# Altium PCB Hex_Link_Rec.PcbDoc
Units mm, origin at the board's own origin, x right, y up, seen from the top; angles counter-clockwise.
Board outline 19.23 x 56.77 mm, 2 copper layers (Top1, Bottom4), stack 1.071 mm thick; 38 components, 50 nets, 149 pads, 70 vias.
Unrouted connection lines stored in the file: 56.
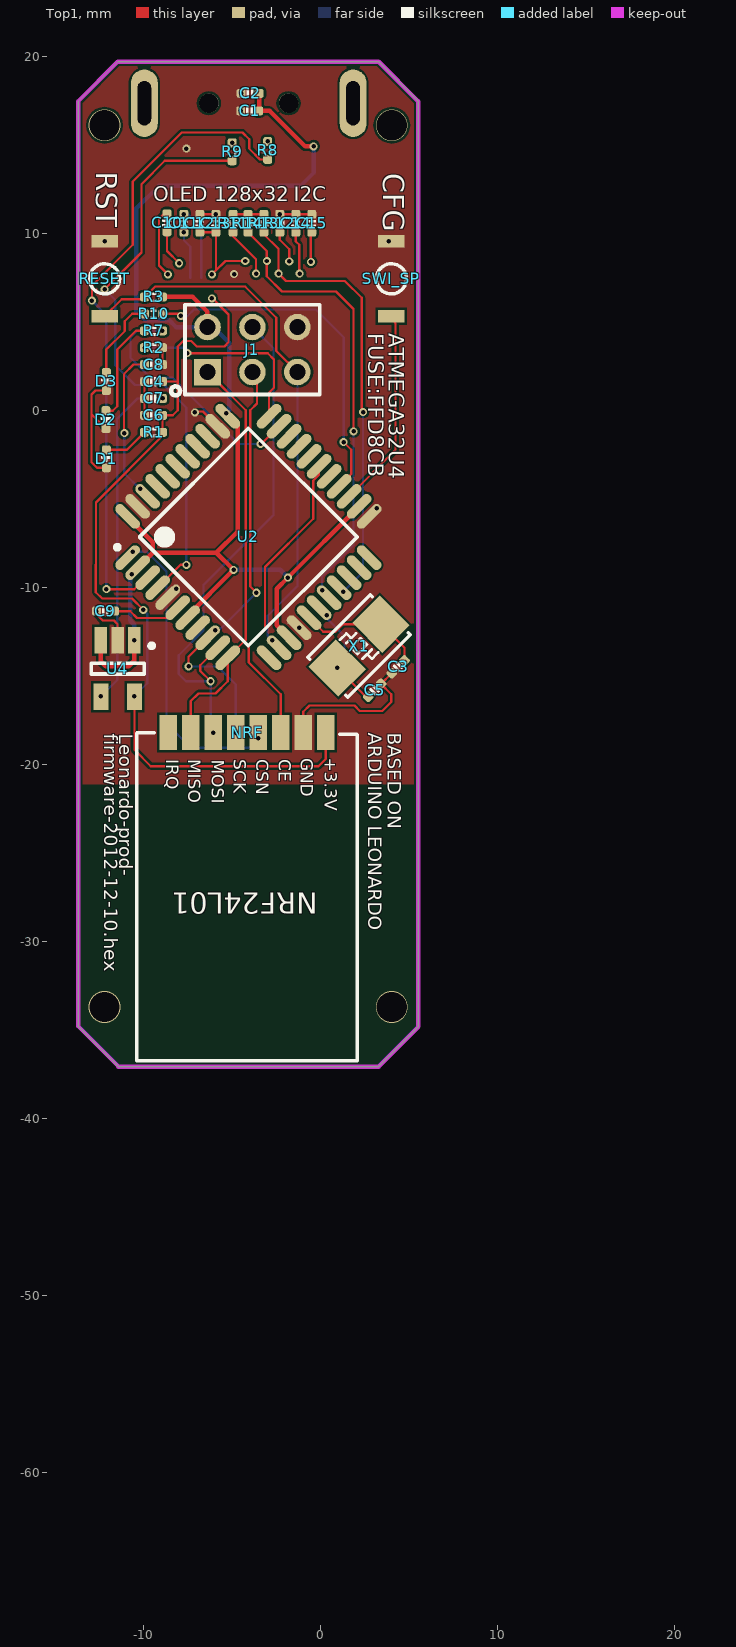
[diagram p0: Top1 view]
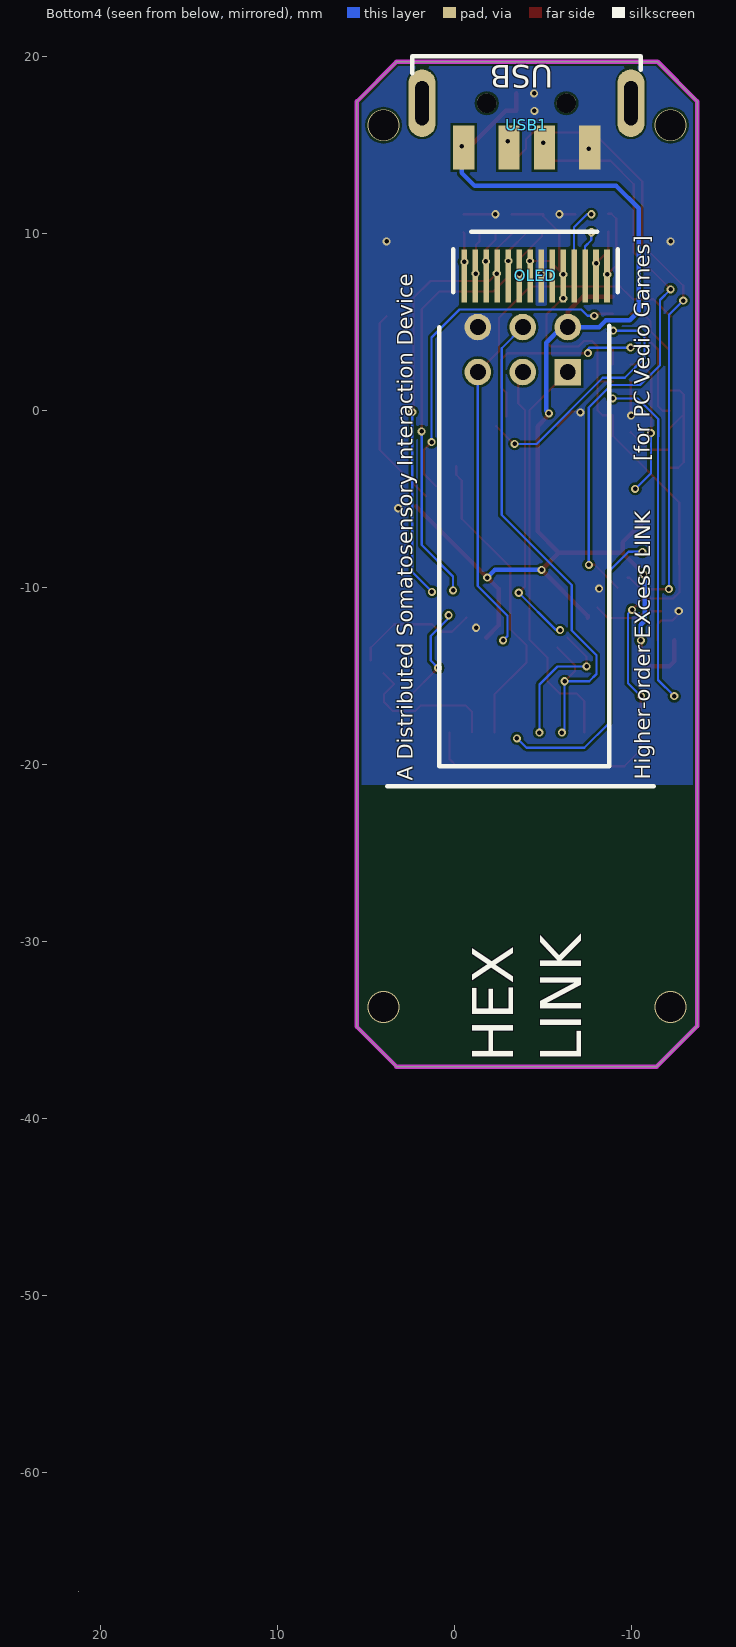
[diagram p1: Bottom4 view, seen from below]
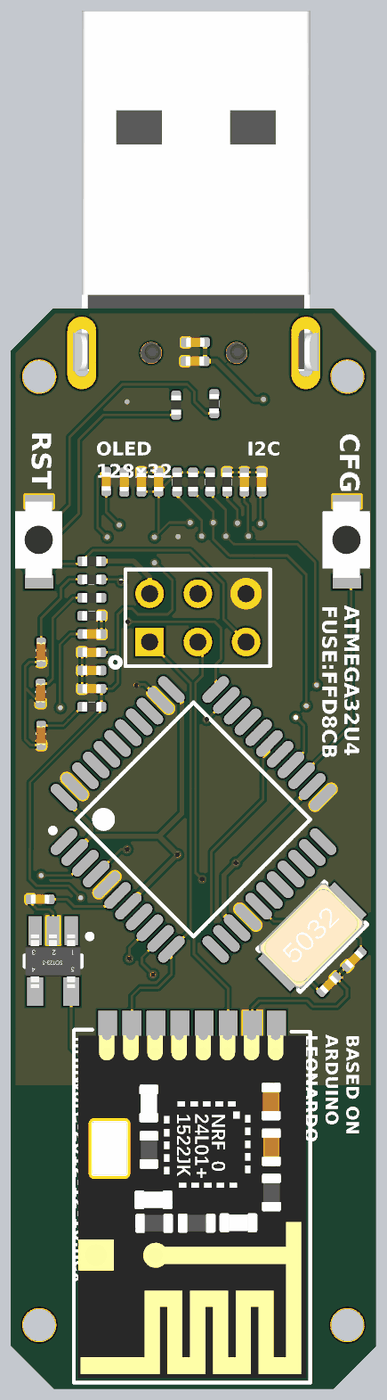
[diagram p2: 3D render of the assembled board from above, using the file's embedded part models]

## Layer stack, top to bottom
Top Solder: solder mask 0.0102, Solder Resist, Dk 3.5
Top1: signal copper 0.0356
Dielectric 2: core 1, PP-006, Dk 4.2
Bottom4: signal copper 0.0356
Bottom Solder: solder mask 0.0102, Solder Resist, Dk 3.5

## Board outline
-13.691,-34.773 -13.691,17.475 -11.456,19.71 3.303,19.71 5.537,17.475 5.537,-34.823 3.303,-37.058 3.302,-37.059 -11.405,-37.059

## Design rules (kind name [scope] priority, off if disabled: settings)
Clearance [All] p1: gap=0.127 ignorepadtopadclearanceinfootprint=FALSE
ComponentClearance [All] p1: gap=0 collisioncheckmode=3 verticalgap=0 showdistances=FALSE
DiffPairsRouting [All] p1: maxlimit=0.229 minlimit=0.229 mostfreqgap=0.229 toplayer_minwidth=0.102 toplayer_maxwidth=0.102 toplayer_prefwidth=0.102 bottomlayer_minwidth=0.102 bottomlayer_maxwidth=0.102 bottomlayer_prefwidth=0.102 maxuncoupledlength=12.7
FanoutControl Fanout_BGA [All] p1: bgadir=Out bgaviamode=Centered fanoutstyle=Auto fanoutdirection=Alternating viagrid=0.025 // Fanout_BGA (Default Rule)
HoleSize [All] p1: absolutevalues=TRUE maxlimit=254 minlimit=0.203 maxpercent=80.000 minpercent=20.000
MinimumSolderMaskSliver [All] p1 off: minsoldermaskwidth=0.051
PlaneClearance [All] p1: clearance=0.203
PlaneConnect [All] p1: planeconnectstyle=Direct reliefexpansion=0.508 reliefentries=4 reliefconductorwidth=0.254 reliefairgap=0.254
PolygonConnect [All] p1: connectstyle=Direct reliefconductorwidth=0.254 reliefentries=4 polygonreliefangle="90 Angle" airgapwidth=0.254
RoomDefinition Arduino_Mouse_Keyboard [InComponentClass('Arduino_Mouse_Keyboard')] p1: confinementstyle=ConfineIn formatcopy=TRUE lockcomponents=FALSE outline -30.023,-51.156 21.615,-51.156 21.615,47.168 -30.023,47.168
RoutingVias [All] p1: holewidth=0.203 width=0.406 viastyle="Through Hole" minholewidth=0.152 minwidth=0.305 maxholewidth=0.711 maxwidth=1.27
SilkToBoardRegionClearance [All] p1 off:
SilkToSilkClearance [All] p1: silktosilkclearance=0
SilkToSolderMaskClearance [IsPad] p1: minsilkscreentomaskgap=0 clearancetoexposedcopper=TRUE
SolderMaskExpansion [All] p1: expansion=0.076
Width 3V3 [InNet('3V3')] p1: maxlimit=0.254 minlimit=0.254 preferedwidth=0.254
Width VDD_5V [InNet('VDD_5V')] p2: maxlimit=0.254 minlimit=0.254 preferedwidth=0.254
Width [All] p3: maxlimit=254 minlimit=0.127 preferedwidth=0.127
20 further rules are at their usual default settings.

## Components (designator, comment, footprint, x,y, rotation, side; value= is the part's Value field where it differs from the comment)
C1 "0.1uF" CAP_0402 -3.988,16.942 r180 top value=0.1u
C2 "10uF" CAP_0402 -3.962,17.932 r180 top
C3 "20pF" CAP_0402 4.394,-14.478 r225 top
C4 "0.1uF" CAP_0402 -9.423,1.648 r180 top value=0.1u
C5 "20pF" CAP_0402 3.07,-15.802 r45 top
C6 "10uF" CAP_0402 -9.423,-0.264 r180 top
C7 "10nF" CAP_0402 -9.423,0.692 r0 top value=0.1u
C8 "1uF" CAP_0402 -9.423,2.603 r0 top
C9 "1uF" CAP_0402 -12.141,-11.328 r180 top
C10 "1uF" CAP_0402 -8.661,10.617 r270 top
C11 "1uF" CAP_0402 -7.707,10.592 r270 top
C12 "1uF" CAP_0402 -6.804,10.592 r90 top
C13 "1uF" CAP_0402 -5.901,10.592 r90 top
C14 "10uF" CAP_0402 -1.386,10.592 r90 top
C15 "1uF" CAP_0402 -0.483,10.592 r90 top
D1 "color?" LED_0402_RED -12.09,-2.718 r270 top
D2 "color?" LED_0402_RED -12.116,-0.508 r270 top
D3 "color?" LED_0402_RED -12.09,1.651 r270 top
J1 "Header 3X2" HDR2X3 -6.375,2.184 r0 top
NRF "NRF24L01" NRF24l01-SMD -4.14,-18.186 r270 top
OLED "OLED_128X32" OLED_128X32 -3.412,13.611 r90 bottom
R1 "2K" RES_0402 -9.423,-1.219 r180 top
R2 "10k" RES_0402 -9.423,3.559 r0 top
R3 "10k" RES_0402 -9.423,6.426 r0 top
R7 "2K" RES_0402 -9.423,4.515 r180 top
R8 "22" RES_0402 -2.972,14.707 r270 top
R9 "22" RES_0402 -4.978,14.63 r270 top
R10 "2K" RES_0402 -9.423,5.471 r180 top
R11 "10K" RES_0402 -4.928,10.592 r270 top
R12 "390K" RES_0402 -2.289,10.592 r270 top
R13 "10K" RES_0402 -3.192,10.592 r90 top
R14 "10K" RES_0402 -4.089,10.592 r90 top
RESET "RST" SW_PB -12.116,7.366 r270 top
SWI_SP "SWI" SW_PB 4.089,7.366 r270 top
U2 "ATmega32U4-AU" 44ML_N -4.064,-7.137 r45 top
U4 "LP2992 3V3" SOT23-5 -11.455,-14.58 r270 top
USB1 "USB-A" USB_A/P_B -0.503,14.866 r0 bottom
X1 "16MHz" "OSC 5032-2P" 2.192,-13.302 r45 top

## Footprints (in the part's own frame and the unit in brackets; to place one, negate y for a bottom-side part, rotate by r counter-clockwise, add the part's x,y. Pads: shape width x height; smd on the part's side, far side on the other; paste and mask are expansions set on the pad)
44ML_N [mm] "Thin QFP, 44-Leads, Body 10x10mm, Pitch 0.8mm, IPC Medium Density"
  oval 1.75x0.55 smd: 1(-5.65,4) 2(-5.65,3.2) 3(-5.65,2.4) 4(-5.65,1.6) 5(-5.65,0.8) 6(-5.65,0) 7(-5.65,-0.8) 8(-5.65,-1.6) 9(-5.65,-2.4) 10(-5.65,-3.2) 11(-5.65,-4) 23(5.65,-4) 24(5.65,-3.2) 25(5.65,-2.4) 26(5.65,-1.6) 27(5.65,-0.8) 28(5.65,0) 29(5.65,0.8) 30(5.65,1.6) 31(5.65,2.4) 32(5.65,3.2) 33(5.65,4)
  oval 0.55x1.75 smd: 12(-4,-5.65) 13(-3.2,-5.65) 14(-2.4,-5.65) 15(-1.6,-5.65) 16(-0.8,-5.65) 17(0,-5.65) 18(0.8,-5.65) 19(1.6,-5.65) 20(2.4,-5.65) 21(3.2,-5.65) 22(4,-5.65) 34(4,5.65) 35(3.2,5.65) 36(2.4,5.65) 37(1.6,5.65) 38(0.8,5.65) 39(0,5.65) 40(-0.8,5.65) 41(-1.6,5.65) 42(-2.4,5.65) 43(-3.2,5.65) 44(-4,5.65)
  silkscreen extent -5.77,-4.35 4.35,4.95, body extent -5,-5 5,5, height 1.2
CAP_0402 [mil]
  rrect50% 20x20 smd: 1(-20,0) 2(20,0)
  silkscreen extent -7,-9 7,9, body extent -20,-10 20,10, height 20
HDR2X3 [mm] "Connector; Header; 3x2 Position"
  rect 1.5x1.5 hole 0.9: 1(0,0)
  round 1.5 hole 0.9: 2(0,2.54) 3(2.54,0) 4(2.54,2.54) 5(5.08,0) 6(5.08,2.54)
  silkscreen extent -1.27,-1.27 6.35,3.81
LED_0402_RED [mil]
  rrect50% 20x20 smd: 1(-20,0) 2(20,0)
  silkscreen extent -6,-11 6,10, body extent -20,-10 20,10, height 18
NRF24l01-SMD [mm]
  rect 2x1 smd: 1(0,4.445) 2(0,3.175) 3(0,1.905) 4(0,0.635) 5(0,-0.635) 6(0,-1.905) 7(0,-3.175) 8(0,-4.445)
  silkscreen extent 0,-6.22 18.54,6.22, body extent 0.29,-6 18.31,6, height 1.53
OLED_128X32 [mm]
  rect 3x0.32 smd: 1(-5.992,-5.184) 2(-5.991,-4.563) 3(-5.992,-3.944) 4(-5.991,-3.324) 5(-5.991,-2.704) 6(-5.992,-2.084) 7(-5.992,-1.464) 8(-5.992,-0.844) 9(-5.992,-0.224) 10(-5.992,0.396) 11(-5.992,1.016) 12(-5.992,1.636) 13(-5.992,2.256) 14(-5.991,2.875)
  silkscreen extent -33.7,-5.8 -3.5,4.3, body extent -34.68,-5.8 -0.44,5.2, height 1.13
"OSC 5032-2P" [mm]
  rect 2.2x2.4 smd: 1(-1.75,0) 2(1.75,0)
  silkscreen extent -2.5,-1.6 2.5,1.6, body extent -2.5,-1.52 2.5,1.68, height 0.86
RES_0402 [mil]
  rrect50% 20x20 smd: 1(-20,0) 2(20,0)
  silkscreen extent -7,-10 7,10, body extent -20,-10 20,10, height 14
SOT23-5 [mm]
  rect 1.5x0.7 smd: 1(-1.595,0.95) 2(-1.595,0) 3(-1.595,-0.95)
  rect 1.5x0.85 smd: 4(1.595,-0.95) 5(1.595,0.95)
  silkscreen extent -1.42,-1.5 0.3,2.05, body extent -1.39,-1.46 1.41,1.44, height 1.09
SW_PB [mm]
  rect 0.7x1.5 smd: 1(-2.203,-0.073) 2(2.032,-0.073)
  silkscreen extent -0.93,-0.92 0.77,0.78, body extent -2.19,-1.35 1.81,1.15, height 1.6
USB_A/P_B [mm]
  oval 1.524x3.81 hole 0.762 slot 2.5 at 90 deg: 0(-9.443,-2.508) 0(2.357,-2.508)
  round 1.1 hole 1.1: 0(-5.793,-2.508) 0(-1.293,-2.508)
  rect 1.2x2.5 smd: 1(0,0) 2(-2.556,0) 3(-4.556,0) 4(-7.112,0)
  silkscreen extent -9.99,-5.18 2.91,-4.21, body extent -9.91,-20.46 3.04,0.14, height 3.25

## Part data
C1 C4 C7: library part 电容-0402, "Capacitor"
C2 C3 C5 C6 C8 C9 C10 C11 C12 C13 C14 C15: library part CAP, "无极性电容"
D1 D2 D3: library part LED_0402, "LED", Type=0402
J1: "Header, 3-Pin, Dual row", LatestRevisionDate=17-Jul-2002, LatestRevisionNote="Re-released for DXP Platform.", Publisher="Altium Limited"
R1 R2 R3 R7 R8 R9 R10 R11 R12 R13 R14: library part RES
RESET SWI_SP: library part SW-PB, "Switch", LatestRevisionDate=17-Jul-2002, LatestRevisionNote="Re-released for DXP Platform.", PackageDescription="Switch; 2 Leads", PackageReference=SPST-2, Published=24-Mar-1999, Publisher="Altium Limited"
U2: "8-bit AVR Microcontroller, 2.7-5.5V, 32KB Flash, 2.5KB EEPROM, 1KB SRAM, USB Controller, 44-pin TQFP, Industrial Grade (-40癈 to 85癈)", Supplier Part Number 1=ATMEGA32U4-AU-ND, ComponentLink1Description="Manufacturer Link", ComponentLink1URL=http://www.atmel.com/products/avr/default.asp?, ComponentLink2Description="ATmega16U4/32U4 Datasheet", ComponentLink2URL=http://www.atmel.com/dyn/resources/prod_documents/doc7766.pdf, ComponentLink3Description="ATmega16U4 ATmega32U4 Summary", ComponentLink3URL=http://www.atmel.com/dyn/resources/prod_documents/7766S.pdf, ComponentLink4Description="Atmel.com Home", ComponentLink4URL=http://www.atmel.com, DatasheetVersion="revD, Jan-2009", PackageDescription="44-Pin Plastic Thin Quad Flat Pack, 10 x 10 x 1.0 mm Body, 0.8 mm Pitch (TQFP)", PackageReference=44ML, PackageVersion="rev.G, Jul-2007", Published=1-Apr-2010, Publisher="Altium Limited", Supplier 1=Digi-Key, Supplier 2=Farnell, Supplier 3=Mouser, Supplier Part Number 2=1748525, Supplier Part Number 3=556-ATMEGA32U4-AU
U4: library part LP2992, "LDO"
X1: library part XTAL-2P, "2脚无源脚晶振"

## Via types
v1: diameter 0.457, hole 0.254, Top1 to Bottom4, tented both sides, 66 vias
v2: diameter 1.8, hole 1.7, Top1 to Bottom4, 4 vias

## Nets (pads, with @x,y where several pads share a name; then routed paths per layer and width w, separated by ;. In a path a pad name is that pad's centre, name@x,y a point inside that pad or via, vN(x,y) a via of type N, cw(c..) or ccw(c..) an arc to the next point about the centre after c; other vN are vias at no path point)
A0: U2.36
A1: U2.37
A2: U2.38
A3: U2.39
A4: U2.40
A5: U2.41
D0/RX: U2.20
D1/TX: U2.21
D2/SDA: OLED.11 R13.1 U2.19 | length 24.9
  Top1 w0.127: R13.1 -3.192,9.974 -2.362,9.144 v1(-2.362,7.747) -1.943,7.328 1.384,7.328 2.337,6.375 v1@2.337,-0.076
  Bottom4 w0.127: v1@1.372,-10.16 2.413,-9.119 v1(2.413,-0.076)
  other v1: 1.295,-10.236
D3/SCL: OLED.10 R14.1 U2.18 | length 25.2
  Top1 w0.127: R14.1 -3.023,9.017 v1(-3.023,8.458) -3.023,7.595 -2.159,6.731 0.889,6.731 1.88,5.74 v1(1.88,-1.168)
  Bottom4 w0.127: v1(0.102,-10.16) 0.102,-9.373 1.88,-7.595 v1(1.88,-1.168)
D4: SWI_SP.2 U2.25 | length 11.4
  Top1 w0.127: U2.25 4.242,-2.226 4.242,4.956 SWI_SP.2@3.864,5.334
D5: U2.31
D6: U2.27
D7: NRF.4 U2.1 | length 16.9
  Bottom4 w0.127: v1(-10.592,-7.976) -9.804,-7.976 -8.687,-9.093 -8.687,-17.678 -7.315,-19.05 -4.039,-19.05 v1(-3.505,-18.517)
D8: NRF.3 U2.28 | length 17.4
  Top1 w0.127: NRF.3 -2.235,-16.027 -4.039,-14.224 -4.039,-13.259 -3.124,-12.344 -3.124,-8.839 -0.393,-6.108 -0.393,-3.939 -0.069,-3.615 U2.28
D9: U2.29
D10: U2.30
D11: U2.12
D12: R10.1 U2.26 | length 20
  Top1 w0.127: R10.1 -7.985,5.471 v1(-7.874,5.359) ; U2.26 1.753,-3.584 1.753,-2.21 v1(1.321,-1.778)
  Bottom4 w0.127: v1(-7.874,5.359) -7.493,5.359 -7.137,5.715 -0.254,5.715 1.321,4.14 v1(1.321,-1.778)
D13: R7.1 U2.32 | length 13.9
  Top1 w0.127: v1(-3.378,-1.88) -3.332,-1.88 U2.32
  Bottom4 w0.127: v1(-8.941,4.521) -10.363,4.521 -10.719,4.166 -10.719,2.972 -9.601,1.854 -8.357,1.854 -4.623,-1.88 v1@-3.454,-1.88
GND: C1.2 C2.2 C3.2 C4.2 C5.2 C6.2 C7.1 C8.2 C9.2 C12.2 C13.2 C14.2 C15.2 D1.2 D2.2 D3.2 J1.6 NRF.2 OLED.7 R2.2 R12.1 RESET.1 SWI_SP.1 U2.5 U2.15 U2.23 U2.35 U2.43 U4.2 USB1.4 | length 25.4
  Top1 w0.127: v1(-12.649,-11.328) -12.649,-11.506 -12.294,-11.862 -11.659,-11.862 -11.455,-12.065 U4.2 ; D2.2 -12.929,-0.203 ; D1.2 -12.624,-3.226 -12.929,-2.921 -12.929,-0.203 ; D3.2 -12.7,1.143 -12.929,0.914 -12.929,-0.203 ; C6.2 C7.1 C4.2 ; C8.2 R2.2 ; v1(-7.087,-0.102) -7.032,-0.047 -6.629,-0.047 U2.35 ; C12.2 v1(-5.901,11.1) ; v1(-2.289,11.1) C14.2 C15.2 ; NRF.2 -0.965,-17.018 -0.61,-16.662 1.93,-16.662 2.235,-16.967 3.505,-16.967 4.013,-16.459 4.013,-16.027 C5.2 C3.2
  other v1: -1.2,-12.264 -8.153,-10.058 3.2,-5.512 -9.957,-0.279 -4.877,7.722 -12.189,9.569 3.864,9.569 -7.569,14.808 -4.496,16.942 -4.47,17.932
MCU_D+: R9.2 U2.4 | length 33.1
  Top1 w0.127: v1(-12.192,6.858) -10.109,8.941 -10.109,12.802 -8.788,14.122 R9.2 ; U2.4 -7.902,-8.712 v1(-7.569,-8.712)
  Bottom4 w0.127: v1(-12.192,6.858) -11.582,6.248 -11.582,2.565 -10.465,1.448 -8.839,1.448 -7.569,0.178 v1(-7.569,-8.712)
MCU_D-: R8.2 U2.3 | length 36.6
  Top1 w0.127: v1(-12.903,6.223) -12.903,7.061 -10.592,9.373 -10.592,12.954 -7.823,15.723 -4.394,15.723 -4.013,15.342 -4.013,14.808 -3.404,14.199 R8.2 ; v1(-12.09,-10.084) -10.516,-10.084 -9.867,-9.435 U2.3
  Bottom4 w0.127: v1(-12.903,6.223) -12.09,5.41 v1(-12.09,-10.084)
MCU_MISO: J1.1 NRF.7 U2.11 | length 23.1
  Top1 w0.127: NRF.7 -7.315,-16.408 -6.883,-15.977 -5.918,-15.977 -5.231,-15.289 U2.11 -4.216,-12.947 -4.216,0.025 J1.1
MCU_MOSI: J1.4 NRF.6 U2.10 | length 29.8
  Top1 w0.127: v1(-6.198,-15.291) -6.782,-14.707 -6.782,-14.381 U2.10
  Bottom4 w0.127: v1(-6.045,-18.186) -6.198,-18.034 v1(-6.198,-15.291) -7.595,-15.291 -8.001,-14.884 -8.001,-13.818 -6.604,-12.421 -6.604,-9.855 -2.642,-5.893 -2.642,3.531 J1.4
MCU_SCK: J1.3 NRF.5 U2.9 | length 24
  Top1 w0.127: v1(-7.442,-14.453) -7.442,-13.91 U2.9 ; J1.3 -3.581,1.93 -3.581,0.406 -3.962,0.025 -3.962,-9.931 v1(-3.607,-10.287)
  Bottom4 w0.127: v1(-7.442,-14.453) -5.791,-14.453 -4.775,-15.469 v1(-4.775,-18.186) ; v1(-5.944,-12.395) -5.715,-12.395 v1(-3.607,-10.287)
NetC3_1: C3.1 U2.16 X1.2 | length 7.2
  Top1 w0.127: U2.16 0.164,-12.497 0.864,-12.497 1.295,-12.065 X1.2 4.753,-13.389 C3.1
NetC5_1: C5.1 U2.17 X1.1 | length 6
  Top1 w0.127: v1(0.954,-14.54) 2.576,-16.162 C5.1
  Bottom4 w0.127: v1(0.356,-11.557) 0.356,-11.709 1.372,-12.725 1.372,-14.122 v1(0.954,-14.54)
NetC7_2: C7.2 U4.4 | length 19.1
  Bottom4 w0.127: v1(-12.395,-16.129) -11.481,-15.215 -11.481,-1.456 -11.493,-1.444 -11.493,-0.47 -10.331,0.692 v1(-8.915,0.692)
NetC8_1: C8.1 U2.42 | length 8.1
  Top1 w0.127: v1@-11.1,-1.168 -11.1,2.057 -10.554,2.603 C8.1
  Bottom4 w0.127: v1(-11.074,-1.27) -11.074,-3.531 v1(-10.185,-4.42)
NetC9_1: C9.1 U2.6 | length 4
  Top1 w0.127: C9.1 -10.733,-11.328 -10.352,-11.709 -8.636,-11.709 U2.6
NetC10_1: C10.1 OLED.1 | length 3.9
  Top1 w0.127: C10.1 -8.839,11.125 -9.119,10.846 -9.119,8.204 v1(-8.611,7.696)
NetC10_2: C10.2 OLED.2 | length 2.1
  Top1 w0.127: C10.2 -8.661,9.017 v1(-7.976,8.331)
NetC11_1: C11.1 OLED.4 | length 4.2
  Bottom4 w0.127: v1(-7.707,11.1) -7.468,11.1 -6.733,10.365 OLED.4@-6.733,7.493
NetC11_2: C11.2 OLED.3 | length 2.7
  Bottom4 w0.127: v1(-7.707,10.084) -7.707,9.638 -7.353,9.283 OLED.3@-7.353,7.493
NetC14_1: C14.1 OLED.13 | length 2.4
  Top1 w0.127: C14.1 -1.386,9.565 -1.194,9.373 -1.194,7.772 v1(-1.168,7.747)
NetC15_1: C15.1 OLED.14 | length 1.7
  Top1 w0.127: v1(-0.533,8.407) -0.533,10.033 C15.1
NetD1_1: D1.1 R1.2 | length 2.6
  Top1 w0.127: D1.1 -10.922,-2.21 R1.2
NetD2_1: D2.1 R7.2 | length 5.9
  Top1 w0.127: D2.1 -11.735,0 -11.481,0.254 -11.481,3.454 -10.42,4.515 R7.2
NetD3_1: D3.1 R10.2 | length 4.6
  Top1 w0.127: D3.1 -12.09,3.454 -11.049,4.496 -11.049,5.055 -10.633,5.471 R10.2
NetOLED_12: OLED.12 R12.2 | length 1.9
  Top1 w0.127: R12.2 -2.289,9.655 -1.753,9.119 v1(-1.753,8.433)
NetR2_1: R2.1 U2.33 | length 11
  Top1 w0.127: v1(-7.518,3.251) -2.972,3.251 -2.616,2.896 -2.616,1.295 -2.897,1.014 U2.33
  Bottom4 w0.127: v1(-9.931,3.559) -7.598,3.559 -7.518,3.48 v1(-7.518,3.251)
OLED_RES: OLED.9 R11.2 | length 2.9
  Top1 w0.127: R11.2 -4.928,9.855 -3.632,8.56 v1(-3.632,7.747)
OLED_VDD: C4.1 C6.1 C12.1 C13.1 NRF.1 OLED.5 OLED.8 R1.1 R11.1 R13.2 R14.2 U4.5 | length 55.8
  Top1 w0.127: U4.5 -10.505,-19.162 -9.576,-20.091 -0.102,-20.091 0.305,-19.685 NRF.1 ; v1(-10.008,-11.252) -10.643,-10.617 -12.329,-10.617 -12.687,-10.259 -12.687,-8.7 -12.675,-8.687 -12.675,-5.182 -8.915,-1.422 R1.1 C6.1 -8.341,-0.264 -8.052,0.025 -8.052,1.648 ; C4.1 -8.052,1.648 ; C12.1 C13.1 ; v1(-6.121,7.696) -5.901,7.916 ; v1@-6.096,6.35 -5.182,5.436 -5.182,3.861 -5.41,3.632 -6.985,3.632 -7.29,3.937 -7.747,3.937 -8.052,3.632 -8.052,1.648 ; v1(-4.242,8.458) -5.359,8.458 -5.901,7.916 ; R13.2 R14.2 R11.1 -4.998,11.1 -4.998,10.987 C13.1 ; -5.901,7.916 C13.1
  Bottom4 w0.127: v1@-10.505,-16.129 -9.779,-15.403 -9.779,-11.481 v1(-10.008,-11.252)
  other v1: -10.516,-16.129 -6.121,6.35
RESET: J1.5 R3.1 RESET.2 U2.13 | length 30.7
  Top1 w0.127: RESET.2 -11.227,6.296 -10.062,6.296 R3.1 -9.347,7.01 -4.242,7.01 -2.489,5.258 -2.489,3.378 J1.5
  Bottom4 w0.127: v1(-2.718,-12.985) -2.972,-12.731 -2.972,-11.582 -1.295,-9.906 J1.5
RXLED: U2.8
TXLED: U2.22
USB-PWR-DM: R8.1 USB1.2
  other v1: -2.972,15.215
USB-PWR-DP: R9.1 USB1.3
  other v1: -4.978,15.138
VDD_5V: C1.1 C2.1 J1.2 R3.2 U2.2 U2.7 U2.14 U2.24 U2.34 U2.44 U4.1 U4.3 USB1.1 | length 78.9
  Top1 w0.254: U4.3 -12.405,-14.163 -12.116,-14.453 -10.824,-14.453 -10.505,-14.134 v1(-10.505,-12.985) ; U2.44 -10.888,-6.029 -9.474,-7.442 -9.474,-8.022 ; U2.2 -9.474,-8.022 ; R3.2 -7.214,6.426 -6.375,5.588 J1.2 ; U2.7 -7.493,-11.583 v1(-4.902,-8.992) -5.872,-8.022 ; U2.34 -4.674,-0.871 -4.674,-6.824 -5.872,-8.022 ; C2.1 -3.454,16.967 C1.1 -2.87,16.942 -0.864,14.935 v1(-0.381,14.935) ; U2.14 -2.464,-12.132 -2.464,-10.063 v1(-1.829,-9.428) U2.24 ; -9.474,-8.022 -5.872,-8.022
  Bottom4 w0.254: v1(-10.668,-9.246) -10.733,-9.311 -10.733,-11.863 -10.505,-12.091 v1(-10.505,-12.985) ; v1@-5.156,0 -5.156,3.835 -6.045,4.724 J1.2 -8.153,4.724 -8.534,5.105 -9.881,5.105 -10.389,5.613 -10.389,11.43 -9.119,12.7 -1.116,12.7 -0.381,13.435 v1(-0.381,14.935) ; v1(-4.902,-8.992) -2.265,-8.992 v1(-1.829,-9.428)
  other v1: -5.309,-0.152
pads on no net: NRF.8 OLED.6 USB1.0
copper on no net:
  other v2: -12.189,-33.706 4.039,-33.706 -12.189,16.129 4.039,16.129

## Polygon pours and split planes (outlines as drawn)
GND on Top1 "Top1-GND" (solid, pour order 26): 3.099,19.71 5.333,17.475 5.537,17.475 5.537,-21.107 -13.741,-21.107 -13.741,17.424 -11.456,19.71
no net on Top1 "Top1-No Net" (solid, pour order 6): -89.687,10.109
GND on Bottom4 "Bottom4-GND" (solid, pour order 28): 3.303,19.71 5.537,17.475 5.537,-21.082 5.486,-21.133 -13.691,-21.133 -13.691,17.475 -11.456,19.71

## Keep-outs
Keep-Out Layer:
  lines w0.254: 3.302,-37.059 -11.405,-37.059 -13.691,-34.773 -13.691,17.475 -11.456,19.71 3.303,19.71 5.537,17.475 5.537,-34.823 3.303,-37.058

## Silkscreen, mask and mechanical layers (free items; w line width, h text height)
Top Overlay:
  circle w0.254: c-8.179,1.118 r0.254
  text "RST" at -13.056,13.513 h2 r270
  text "CFG" at 3.175,13.411 h2 r270
  text "OLED 128x32" at -9.449,11.557 h1.4
  text "I2C" at -1.499,11.557 h1.4
  text "FUSE:FFD8CB" at 2.388,4.369 h1.5 r270
  text "ATMEGA32U4" at 3.556,4.369 h1.5 r270
  text "ARDUINO LEONARDO" at 2.464,-18.186 h1.3 r270
  text "BASED ON" at 3.556,-18.186 h1.3 r270
  text "firmware-2012-12-10.hex" at -12.471,-18.263 h1.3 r270
  text "Leonardo-prod-" at -11.608,-18.263 h1.3 r270
  text "NRF24L01" at -0.152,-26.848 h2 r180
Bottom Overlay:
  lines w0.025: 21.271,-66.751 21.297,-66.751 ; 21.271,-66.726 21.297,-66.726 ; 21.271,-66.7 21.297,-66.7
  lines w0.254: -11.227,-21.234 3.835,-21.234
  text "[for PC Vedio Games]" at -11.328,-2.87 h1.5 r270
  text "Higher-order EXcess LINK" at -11.354,-20.853 h1.5 r270
  text "A Distributed Somatosensory Interaction Device" at 2.083,-20.904 h1.5 r270
  text "LINK" at -7.899,-36.83 h4 r270
  text "HEX" at -4.064,-36.83 h4 r270

## Text inside footprints (layer, text, board x,y; h text height)
NRF: Top Overlay "IRQ" at -8.966,-19.685 h1.2 r270; Top Overlay "MISO" at -7.722,-19.685 h1.2 r270; Top Overlay "MOSI" at -6.401,-19.736 h1.2 r270; Top Overlay "SCK" at -5.156,-19.71 h1.2 r270; Top Overlay "CSN" at -3.886,-19.685 h1.2 r270; Top Overlay "CE" at -2.591,-19.685 h1.2 r270; Top Overlay "GND" at -1.346,-19.634 h1.2 r270; Top Overlay "+3.3V" at 0,-19.609 h1.2 r270
USB1: Bottom Overlay "USB" at -5.57,19.533 h1.27 r180